# Altium PCB 2019-NUC029LAN.PcbDoc (part 1 of 2)
Units mil, origin at the board's own origin, x right, y up, seen from the top; angles counter-clockwise.
Board outline 3307.03 x 3019.03 mil, 2 copper layers (Top Layer, Bottom Layer); 66 components, 62 nets, 308 pads, 91 vias.
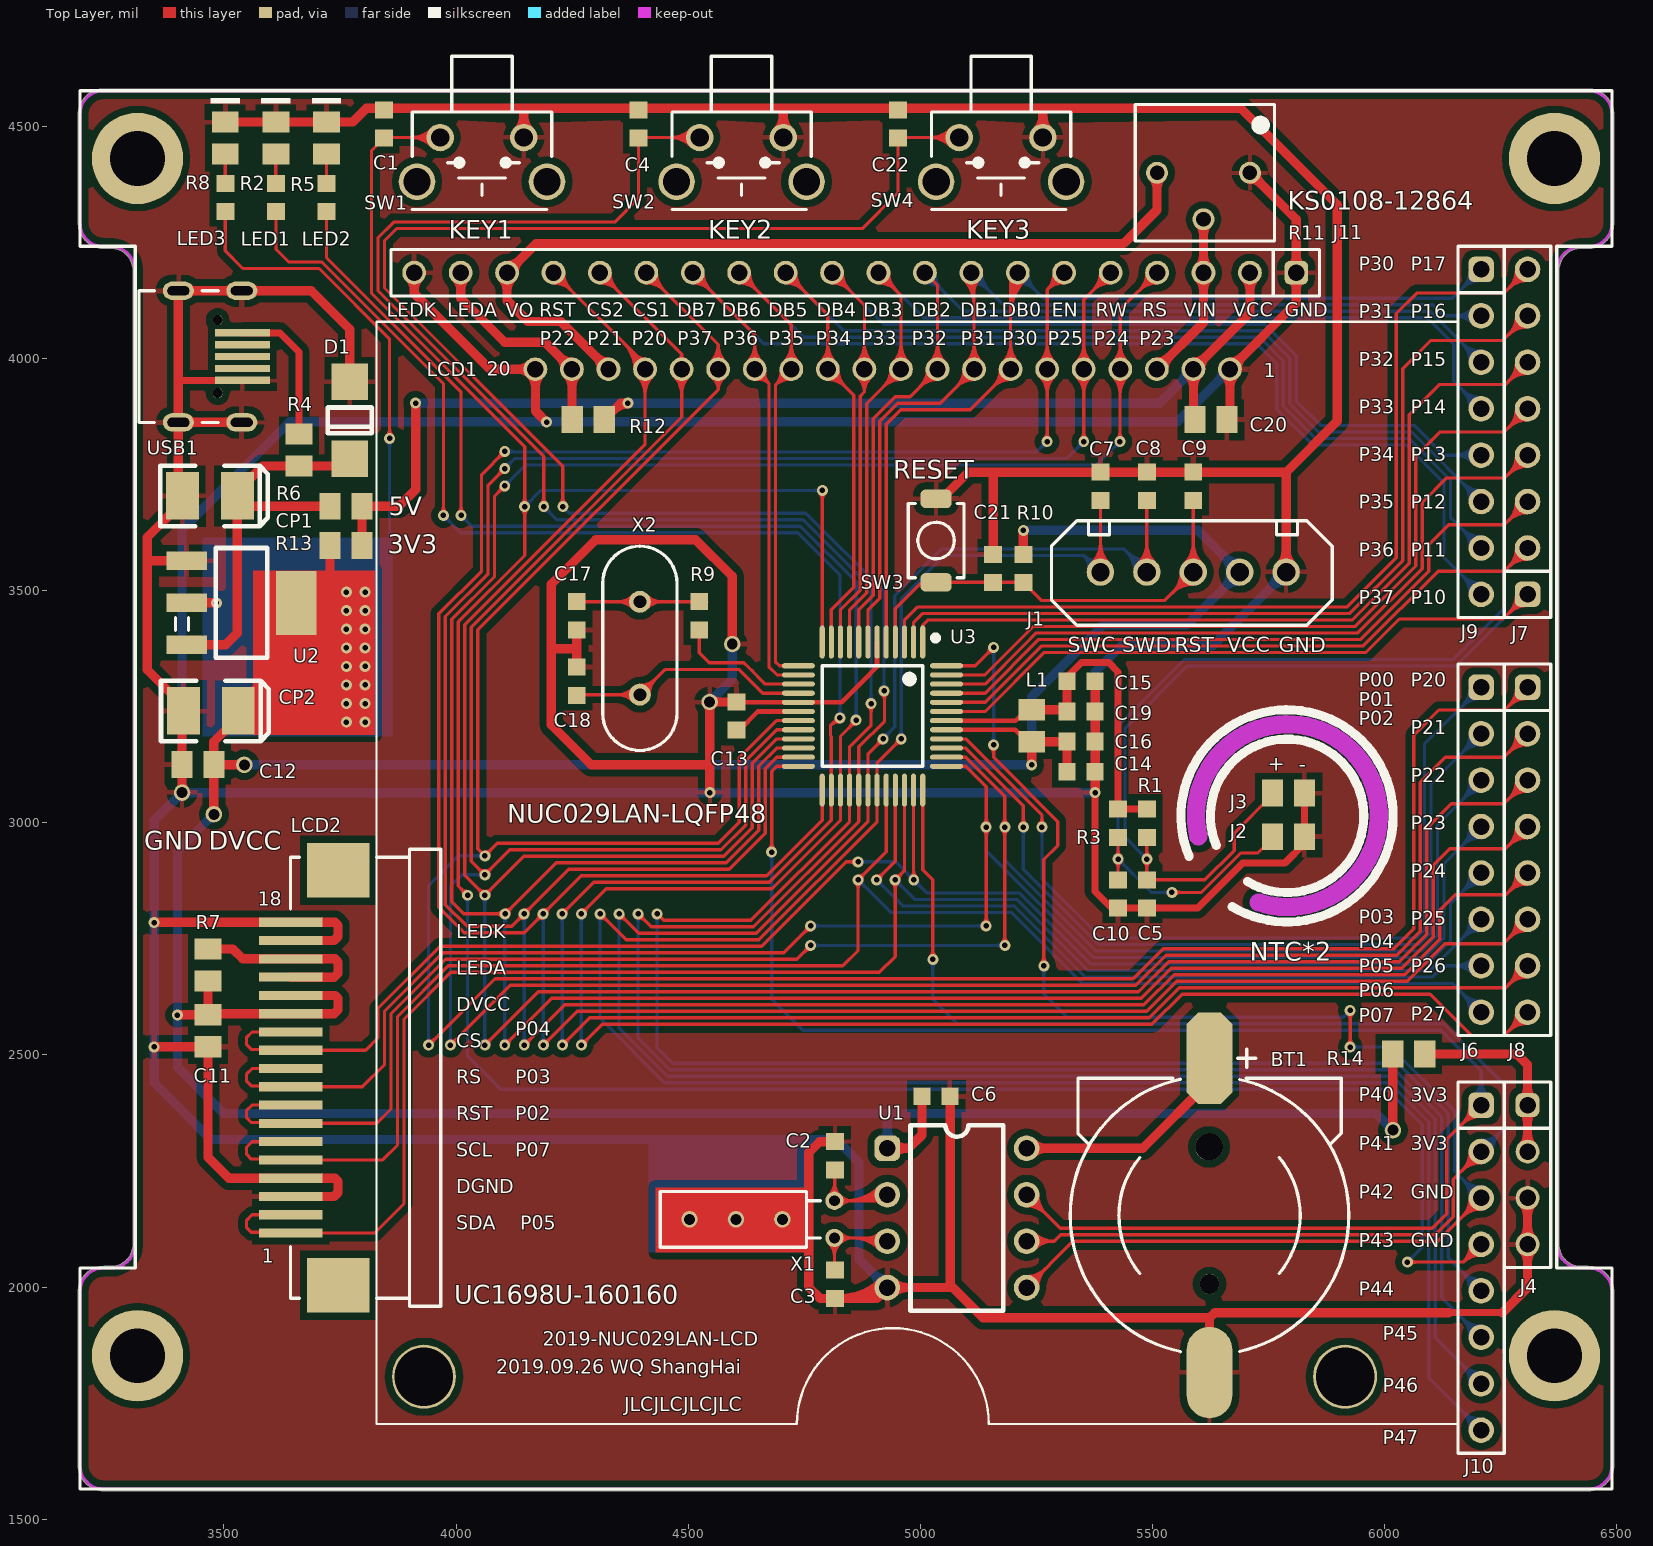
[diagram p0: Top Layer view]
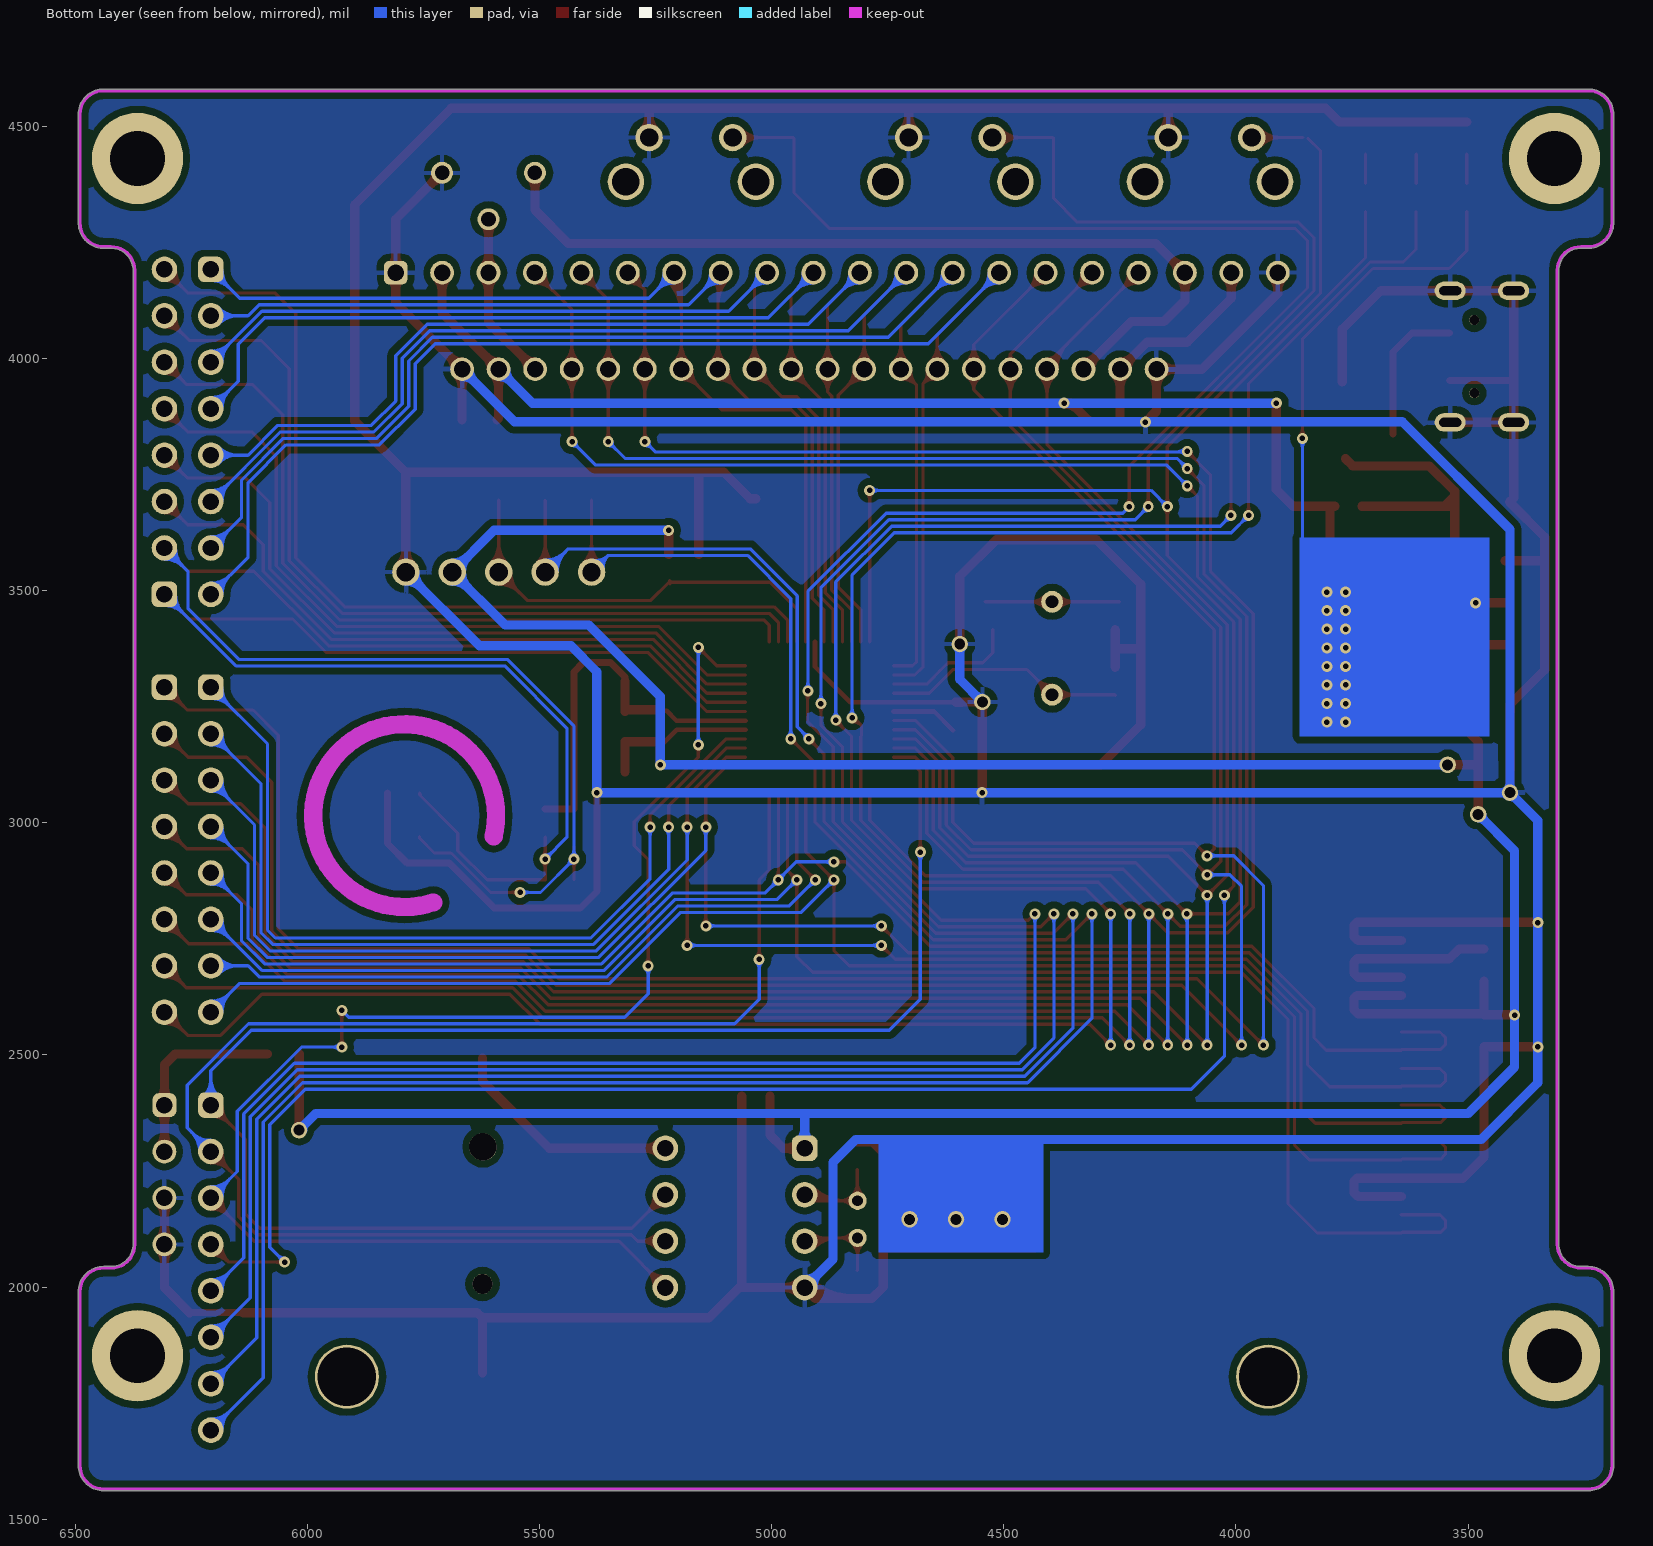
[diagram p1: Bottom Layer view, seen from below]
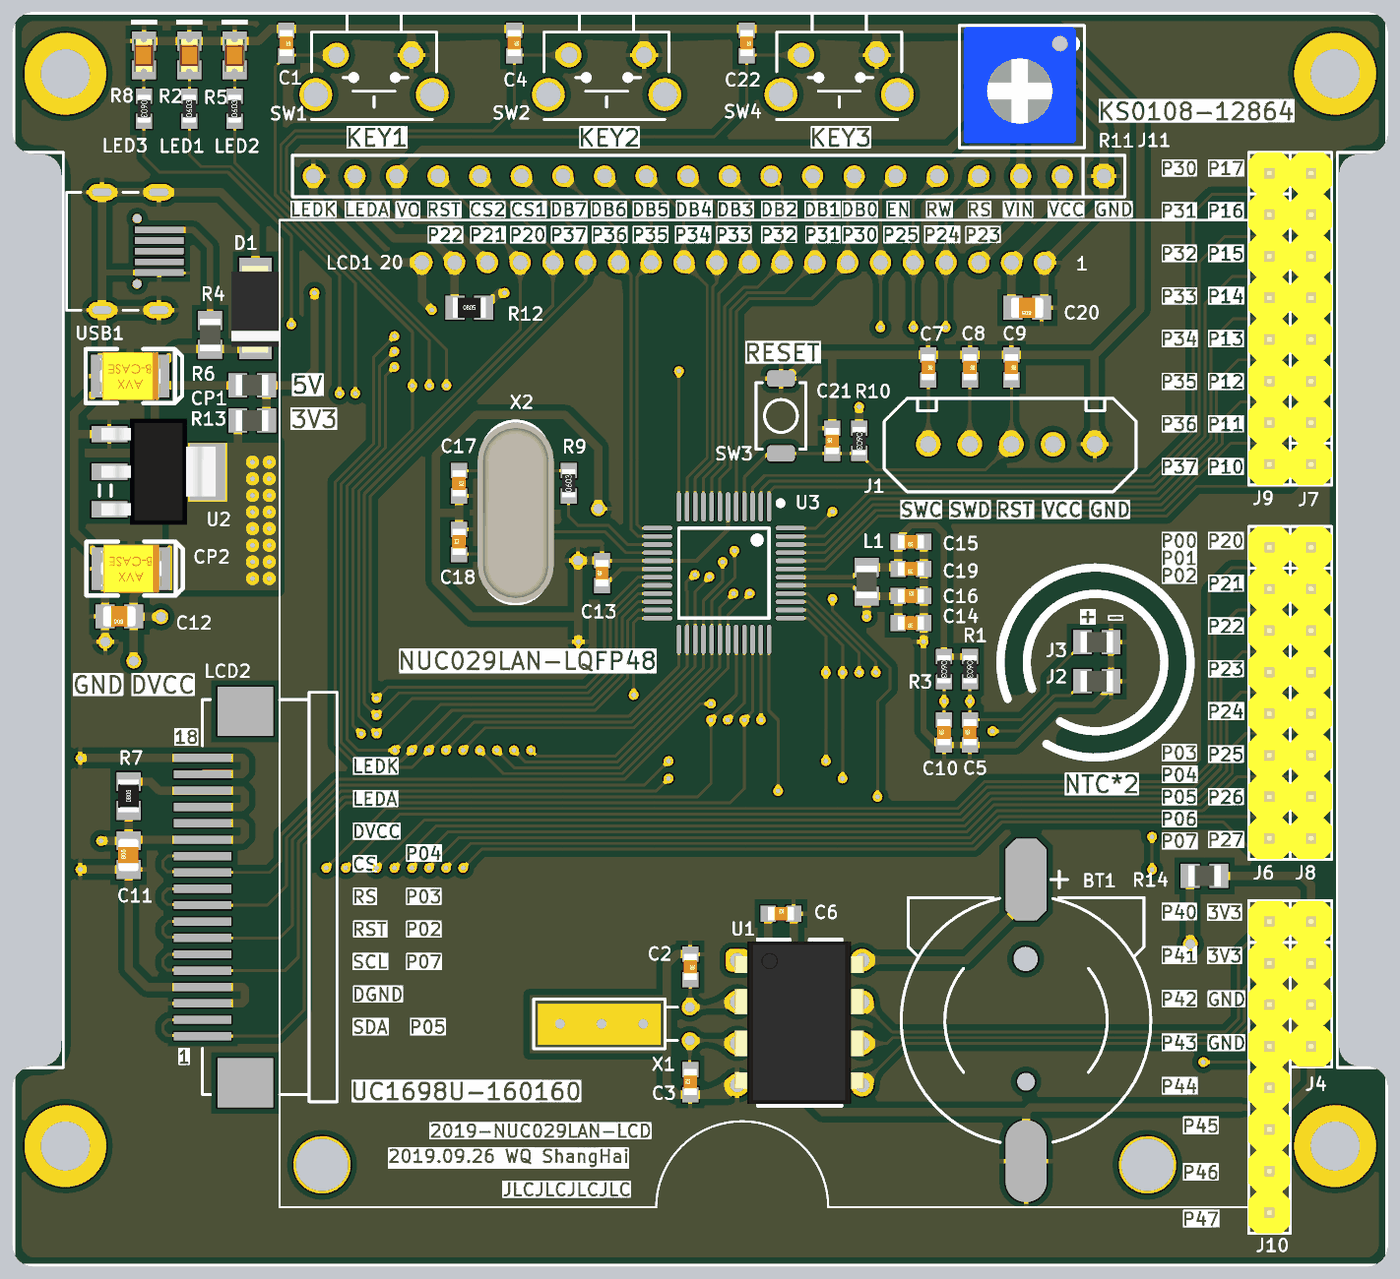
[diagram p3: 3D render of the assembled board from above, using the file's embedded part models]

## Layer stack, top to bottom
Top Layer: signal copper 1.4
Dielectric: dielectric 12.6, FR-4, Dk 4.8
Bottom Layer: signal copper 1.4

## Board outline
3186.49,1616 ccw(c3241,1616) 3241,1561.48 6439,1561.48 ccw(c6439,1616) 6493.52,1616 6493.52,1990 ccw(c6439,1990) 6439,2044.52 6423,2044.52 cw(c6423,2092) 6375.52,2092 6375.52,4190 cw(c6423,4190) 6423,4237.48 6441,4237.48 ccw(c6441,4241) 6441.68,4237.55 ccw(c6439,4292) 6493.45,4289.32 ccw(c6490,4290) 6493.52,4290 6493.52,4526 ccw(c6439,4526) 6439,4580.52 3241,4580.52 ccw(c3241,4526) 3186.49,4526 3186.49,4290 ccw(c3190,4290) 3186.55,4289.32 ccw(c3241,4292) 3238.32,4237.55 ccw(c3239,4241) 3239,4237.48 3257,4237.48 cw(c3257,4190) 3304.49,4190 3304.49,2092 cw(c3257,2092) 3257,2044.52 3241,2044.52 ccw(c3241,1990) 3186.49,1990

## Design rules (kind name [scope] priority, off if disabled: settings)
Clearance [All] p1: gap=7
ComponentClearance [All] p1 off: gap=10 collisioncheckmode=3 verticalgap=10 showdistances=FALSE
Height [All] p1 off: minheight=0 maxheight=1000 prefheight=500
HoleSize [All] p1: absolutevalues=TRUE maxlimit=196.85 minlimit=11.81 maxpercent=80.000 minpercent=20.000
MinimumSolderMaskSliver [All] p1 off: minsoldermaskwidth=10
PolygonConnect [All] p1: connectstyle=Relief reliefconductorwidth=10 reliefentries=4 polygonreliefangle="90 Angle"
RoutingVias [All] p1: holewidth=11.81 width=23.62 viastyle="Through Hole" minholewidth=11.81 minwidth=23.62 maxholewidth=11.81 maxwidth=23.62
SilkToSilkClearance [All] p1 off: silktosilkclearance=10
SilkscreenOverComponentPads [All] p1 off: minsilkscreentomaskgap=10
SolderMaskExpansion [All] p1: expansion=4
Width [All] p1: maxlimit=20 minlimit=7 preferedwidth=10
22 further rules are at their usual default settings.

## Components (designator, comment, footprint, x,y, rotation, side; value= is the part's Value field where it differs from the comment)
BT1 "Battery" cr1200 5623,2493 r270 top
C1 "0.01UF" LC-0603-C 3845,4505 r270 top
C2 "12PF" LC-0603-C 4816,2283 r270 top
C3 "12PF" LC-0603-C 4816,2006 r90 top
C4 "0.01UF" LC-0603-C 4393,4505 r270 top
C5 "0.1UF" LC-0603-C 5488,2847 r90 top
C6 "0.1UF" LC-0603-C 5034,2411 r0 top
C7 "20PF" LC-0603-C 5388,3725 r270 top
C8 "20PF" LC-0603-C 5488.5,3725 r270 top
C9 "20PF" LC-0603-C 5588,3725 r270 top
C10 "0.1UF" LC-0603-C 5426,2847 r90 top
C11 "1UF" lc-0805-c 3466,2552 r90 top
C12 "1UF" lc-0805-c 3444,3126 r180 top
C13 "1UF" LC-0603-C 4604,3230 r90 top
C14 "0.1UF" LC-0603-C 5346.31,3110 r180 top
C15 "0.1UF" LC-0603-C 5346.31,3305 r180 top
C16 "2.2UF" LC-0603-C 5346.31,3175 r0 top
C17 "12PF" LC-0603-C 4260,3446 r270 top
C18 "12PF" LC-0603-C 4260,3305 r90 top
C19 "2.2UF" LC-0603-C 5346.31,3240 r180 top
C20 "1UF" lc-0805-c 5626,3868.35 r180 top
C21 "10UF" LC-0603-C 5157,3548 r90 top
C22 "0.01UF" LC-0603-C 4952,4505 r270 top
CP1 "100UF" LC-CASE-B_3528 3470,3704 r0 top
CP2 "100UF" LC-CASE-B_3528 3472,3241 r0 top
D1 "SMAJ6.0A" LC-SMA(DO-214AC)_S3 3771,3867 r90 top
J1 "SWJ STM32" ICD2 5788,3540 r180 top locked
J2 "CON2" lc-0805-L 5793,2970 r0 top
J3 "CON2" lc-0805-L 5793,3064 r0 top
J4 "CON4" sip-4 6308,2392 r270 top locked
J6 "CON8" sip-8 6208,3292 r270 top locked
J7 "CON8" sip-8 6308,3492 r90 top locked
J8 "CON8" sip-8 6308,3292 r270 top locked
J9 "CON8" sip-8 6208,4192 r270 top locked
J10 "CON8" sip-8 6208,2392 r270 top locked
J11 "CON20" sip-20 5810,4185 r180 top locked
L1 "3.3UH" lc-0805-L 5240,3209 r270 top
LCD1 "12864 KS0108" "12864 ks0108" 6250,1705 r180 top locked
LCD2 "LCD-160160" LCD-160160 3190,1565 r0 top locked
LED1 "LED-BLUE" LC-0805-LED 3612,4475 r270 top
LED2 "LED-BLUE" LC-0805-LED 3721,4475 r270 top
LED3 "LED-BLUE" LC-0805-LED 3503,4475 r270 top
R1 "10K" LC-0603-R 5488,2999 r270 top
R2 "2K" LC-0603-R 3612.06,4347 r90 top
R3 "10K" LC-0603-R 5426,2999 r270 top
R4 "0R" lc-0805-l 3662,3803 r270 top
R5 "2K" LC-0603-R 3721,4347 r90 top
R6 "0R" lc-0805-l 3763,3682 r180 top
R7 "10R" lc-0805-r 3466,2694 r90 top
R8 "2K" LC-0603-R 3503.13,4347 r270 top
R9 "33R" LC-0603-R 4524,3446 r90 top
R10 "10K" LC-0603-R 5222,3548 r270 top
R11 "10K" dwq-4 5463,4253 r0 top
R12 "100R" lc-0805-r 4285,3868.35 r0 top
R13 "0R" lc-0805-l 3763,3597 r180 top
R14 "0R" lc-0805-l 6052,2502 r180 top
SW1 "BUTTON" button-c 4056,4386 r270 top
SW2 "BUTTON" button-c 4615,4386 r270 top
SW3 "BUTTON" button5 5034,3608 r270 top locked
SW4 "BUTTON" button-c 5174,4386 r270 top
U1 "DS1302" stc-dip8 4929,2299 r0 top
U2 "SPX1117-3V3" lc-SOT-223 3538,3474 r180 top
U3 "NUC029LAN" LC-LQFP-48_7x7x05P 4897,3230 r180 top locked
USB1 "USB-Micro-A" USB-MICRO-R 3402,4146 r270 top
X1 "32.768K" xl-2 4815,2146 r270 top
X2 "12M" xl-1 4396,3476 r270 top

## Footprints (in the part's own frame and the unit in brackets; to place one, negate y for a bottom-side part, rotate by r counter-clockwise, add the part's x,y. Pads: shape width x height; smd on the part's side, far side on the other; paste and mask are expansions set on the pad)
"12864 ks0108" [mm]
  round 3.5 hole 3.2: 0(8.509,-2.591) 0(58.903,-2.591)
  round 1.3 hole 0.9: 1(14.808,-57.709) 2(16.808,-57.709) 3(18.808,-57.709) 4(20.808,-57.709) 5(22.808,-57.709) 6(24.808,-57.709) 7(26.808,-57.709) 8(28.807,-57.709) 9(30.807,-57.709) 10(32.807,-57.709) 11(34.807,-57.709) 12(36.807,-57.709) 13(38.807,-57.709) 14(40.807,-57.709) 15(42.807,-57.709) 16(44.807,-57.709) 17(46.807,-57.709) 18(48.806,-57.709) 19(50.806,-57.709) 20(52.806,-57.709)
  silkscreen extent 2.31,-60.3 61.5,0
button5 [mm]
  rrect50% 1x1.7 smd: 1(-2.286,0) 2(2.286,0)
  silkscreen extent -2.03,-1.52 2.03,1.52
button-c [mm]
  round 2 hole 1.5: 0(0.127,3.556) 0(0.127,-3.556)
  round 1.5 hole 1: 1(-2.286,2.286) 2(-2.286,-2.286)
  silkscreen extent -6.73,-3.81 1.65,3.81
cr1200 [mm]
  round 1.5 hole 1.5 unplated: 0(4.85,-0.025)
  round 1.1 hole 1.1 unplated: 0(12.35,0)
  oct 5x2.5 smd: 1(0,0)
  oval 5x2.5 smd: 2(17.2,0)
  silkscreen extent -0.51,-7.62 16.05,7.62
dwq-4 [mm]
  round 1.2 hole 0.8: 1(6.274,3.734) 2(1.194,3.734) 3(3.734,1.194)
  silkscreen extent 0,0 7.62,7.47, body extent 0.23,0.27 7.13,7.37, height 4.9
ICD2 [mm]
  round 1.5 hole 1: 1(10.16,0) 2(7.62,0) 3(5.08,0) 4(2.54,0) 5(0,0)
  silkscreen extent -2.52,-2.81 12.84,2.91
LC-0603-C [mm]
  rect 0.93x0.98 smd: 1(-0.77,0) 2(0.77,0)
  body extent -0.8,-0.4 0.8,0.4, height 0.3
LC-0603-R [mm]
  rect 0.93x0.98 smd: 1(-0.77,0) 2(0.77,0)
  body extent -0.85,-0.4 0.85,0.4, height 0.56
lc-0805-c [mm]
  rect 1.16x1.47 smd: 1(-0.875,0) 2(0.875,0)
  body extent -1,-0.63 1,0.63, height 0.77
lc-0805-L [mm]
  rect 1.16x1.47 smd: 1(-0.875,0) 2(0.875,0)
  body extent -1,-0.64 1,0.64, height 0.6
lc-0805-l [mm]
  rect 1.16x1.47 smd: 1(-0.875,0) 2(0.875,0)
  body extent -1,-0.64 1,0.64, height 0.6
LC-0805-LED [mm]
  rect 1.16x1.47 smd: A(0.875,0) K(-0.875,0)
  silkscreen extent -2.2,-0.8 -1.9,0.8, body extent -1.01,-0.63 1.01,0.62, height 1.1
lc-0805-r [mm]
  rect 1.16x1.47 smd: 1(-0.875,0) 2(0.875,0)
  body extent -1,-0.63 1,0.63, height 0.49
LC-CASE-B_3528 [mm]
  rect 1.8x2.6 smd: 1(1.5,0) 2(-1.5,0)
  silkscreen extent -2.73,-1.65 3.16,1.65, body extent -1.85,-1.47 1.85,1.46, height 2.03
LC-LQFP-48_7x7x05P [mm]
  oval 0.28x1.8 smd mask+0.051: 1(-2.75,-4.05) 2(-2.25,-4.05) 3(-1.75,-4.05) 4(-1.25,-4.05) 5(-0.75,-4.05) 6(-0.25,-4.05) 7(0.25,-4.05) 8(0.75,-4.05) 9(1.25,-4.05) 10(1.75,-4.05) 11(2.25,-4.05) 12(2.75,-4.05) 25(2.75,4.05) 26(2.25,4.05) 27(1.75,4.05) 28(1.25,4.05) 29(0.75,4.05) 30(0.25,4.05) 31(-0.25,4.05) 32(-0.75,4.05) 33(-1.25,4.05) 34(-1.75,4.05) 35(-2.25,4.05) 36(-2.75,4.05)
  oval 1.8x0.28 smd mask+0.051: 13(4.05,-2.75) 14(4.05,-2.25) 15(4.05,-1.75) 16(4.05,-1.25) 17(4.05,-0.75) 18(4.05,-0.25) 19(4.05,0.25) 20(4.05,0.75) 21(4.05,1.25) 22(4.05,1.75) 23(4.05,2.25) 24(4.05,2.75) 37(-4.05,2.75) 38(-4.05,2.25) 39(-4.05,1.75) 40(-4.05,1.25) 41(-4.05,0.75) 42(-4.05,0.25) 43(-4.05,-0.25) 44(-4.05,-0.75) 45(-4.05,-1.25) 46(-4.05,-1.75) 47(-4.05,-2.25) 48(-4.05,-2.75)
  silkscreen extent -3.6,-4.42 2.75,2.75
LC-SMA(DO-214AC)_S3 [mm]
  rect 2x2 smd: 1(2.1,0) 2(-2.1,0)
  silkscreen extent -0.7,-1.2 0.7,1.2, body extent -2.7,-1.43 2.58,1.46, height 2.44
lc-SOT-223 [mm]
  rect 2.2x1 smd: 1(3,-2.3) 2(3,0) 3(3,2.3)
  rect 2.2x3.5 smd: 2(-3,0)
  silkscreen extent -1.4,-3 1.4,3, body extent -3.49,-3.24 3.49,3.24, height 1.64
LCD-160160 [mm]
  round 5 hole 3: 0(3.15,7.29) 0(3.15,72.796) 0(80.67,7.29) 0(80.67,72.796)
  rect 3.4x3 smd: 0(14.133,11.152) 0(14.133,33.852)
  rect 3.5x0.5 smd: 1(11.533,14.007) 2(11.533,15.007) 3(11.533,16.007) 4(11.533,17.007) 5(11.533,18.007) 6(11.533,19.007) 7(11.533,20.007) 8(11.533,21.007) 9(11.533,22.007) 10(11.533,23.007) 11(11.533,24.007) 12(11.533,25.007) 13(11.533,26.007) 14(11.533,27.007) 15(11.533,28.007) 16(11.533,29.007) 17(11.533,30.007) 18(11.533,31.007)
  silkscreen extent 0,0 83.82,76.5
sip-4 [mm]
  rrect50% 1.3x1.3 hole 0.9: 1(0,0)
  round 1.3 hole 0.9: 2(2.54,0) 3(5.08,0) 4(7.62,0)
  silkscreen extent -1.27,-1.27 8.89,1.27, body extent -1.27,-1.27 8.89,1.27, height 6
sip-8 [mm]
  rrect50% 1.4x1.4 hole 0.9: 1(0,0)
  round 1.4 hole 0.9: 2(2.54,0) 3(5.08,0) 4(7.62,0) 5(10.16,0) 6(12.7,0) 7(15.24,0) 8(17.78,0)
  silkscreen extent -1.27,-1.27 19.05,1.27, body extent -1.27,-1.27 19.05,1.27, height 6
sip-20 [mm]
  rrect50% 1.3x1.3 hole 0.9: 1(0,0)
  round 1.3 hole 0.9: 2(2.54,0) 3(5.08,0) 4(7.62,0) 5(10.16,0) 6(12.7,0) 7(15.24,0) 8(17.78,0) 9(20.32,0) 10(22.86,0) 11(25.4,0) 12(27.94,0) 13(30.48,0) 14(33.02,0) 15(35.56,0) 16(38.1,0) 17(40.64,0) 18(43.18,0) 19(45.72,0) 20(48.26,0)
  silkscreen extent -1.27,-1.27 49.53,1.27
stc-dip8 [mm]
  rrect50% 1.4x1.4 hole 0.9: 1(0,0)
  round 1.4 hole 0.9: 2(0,-2.54) 3(0,-5.08) 4(0,-7.62) 5(7.62,-7.62) 6(7.62,-5.08) 7(7.62,-2.54) 8(7.62,0)
  silkscreen extent 1.27,-8.89 6.35,1.27, body extent -0.18,-8.77 7.74,1.14, height 4.19
USB-MICRO-R [mm]
  oval 1x1.7 hole 0.5 slot 1.2 at 90 deg: 0(0,3.47) 0(0,0) 0(7.2,0) 0(7.2,3.47)
  rect 0.4x3 smd: 1(2.3,3.5) 2(2.95,3.5) 3(3.6,3.5) 4(4.25,3.5) 5(4.9,3.5)
  round 0.55 hole 0.55: G(1.6,2.15) G(5.6,2.15)
  silkscreen extent 0,-2.15 7.2,2.2
xl-1 [mm]
  round 1.2 hole 0.7: 1(0,0) 2(5.08,0)
  silkscreen extent -3.05,-2.03 8.13,2.03, body extent -2.95,-2.31 8.09,2.34, height 3.5
xl-2 [mm]
  round 1 hole 0.6: 1(-1.016,0) 2(1.016,0)
  silkscreen extent -1.52,-9.53 1.52,-0.76

## Part data
BT1: "Multicell Battery"
C1 C2 C3 C4 C5 C6 C7 C8 C9 C10 C11 C12 C13 C14 C15 C16 C17 C18 C19 C20 C21 C22: library part CAP
CP1 CP2: library part CAP1
D1: library part DIODE
J1: library part SWJ
J2 J3 J4 J6 J7 J8 J9 J10 J11: "Connector"
L1: library part INDUCTOR
LED1 LED2 LED3: library part LED
R1 R2 R3 R4 R5 R6 R7 R8 R9 R10 R12 R13 R14: library part RES
R11: library part RES-ADJ
U2: library part AMS1117
X1 X2: library part JZ

## Free pads (board coordinates)
  round 35.43 hole 23.62: 0(3410,3065) 1(3478.45,3018.45) 2(3544,3125) 3(6018,2338) 5(4546.31,3260.32) 6(4703,2146) 7(4595,3385) 7(4603,2146) 8(4503,2146)

## Via types
v1: diameter 23.62, hole 11.81, Top Layer to Bottom Layer, 91 vias

## Nets (pads, with @x,y where several pads share a name; then routed paths per layer and width w, separated by ;. In a path a pad name is that pad's centre, name@x,y a point inside that pad or via, vN(x,y) a via of type N, cw(c..) or ccw(c..) an arc to the next point about the centre after c; other vN are vias at no path point)
AIN0: C5.2 J3.1 J7.1 R1.2 U3.43 | length 3519.4
  Top Layer w7: U3.43@5056.45,3239.84 5139.84,3239.84 5267,3367 5960,3367 6032,3439 6090,3439 6255,3439 J7.1@6308,3492 ; v1@5482.12,2916.12 cw(c5467.94,2901.94) 5488,2901.94 cw(c5508.06,2901.94) v1@5493.88,2916.12 ; v1@5482.12,2927.88 ccw(c5467.94,2942.06) 5488,2942.06 ccw(c5508.06,2942.06) v1@5493.88,2927.88 ; R1.2@5488,2968.68 v1(5488,2922) C5.2@5488,2877.32 5613.06,2877.32 5676,2940.25 5676,2978 5756.83,3058.83 J3.1@5756.83,3062.28 ; J7.1@6283.94,3492 cw(c6225.86,3492) 6266.93,3450.93 cw(c6308,3409.86) J7.1@6308,3467.94 ; J7.1@6290.94,3492 cw(c6249.76,3492) 6278.88,3462.88 cw(c6308,3433.76) J7.1@6308,3474.94 ; J3.1@5756.83,3062.28 5758.55,3060.55 J3.1@5758.55,3064 J3.1@5756.83,3062.28
  Bottom Layer w7: v1@5479.69,2922 ccw(c5459.62,2922) 5473.81,2936.19 ccw(c5488,2950.38) v1@5488,2930.31 ; v1(5488,2922) 5441,2969 5441,3204 5575,3338 6154,3338 J7.1@6308,3492 ; J7.1@6283.94,3492 cw(c6225.86,3492) 6266.93,3450.93 cw(c6308,3409.86) J7.1@6308,3467.94 ; J7.1@6290.94,3492 cw(c6249.76,3492) 6278.88,3462.88 cw(c6308,3433.76) J7.1@6308,3474.94
AIN1: C10.2 J2.1 J7.2 R3.2 U3.44 | length 3751.2
  Top Layer w7: U3.44@5056.45,3259.53 5139.73,3259.53 5261.2,3381 5954.2,3381 6115.2,3542 6258,3542 J7.2@6308,3592 ; v1@5420.12,2916.12 cw(c5405.94,2901.94) 5426,2901.94 cw(c5446.06,2901.94) v1@5431.88,2916.12 ; v1@5420.12,2927.88 ccw(c5405.94,2942.06) 5426,2942.06 ccw(c5446.06,2942.06) v1@5431.88,2927.88 ; C10.2@5426,2877.32 v1(5426,2922) 5426,2949.68 ; v1(5542,2850) 5605.54,2850 5690.54,2935 5727,2935 5758.55,2966.55 J2.1@5758.55,2970 ; v1@5547.88,2844.12 cw(c5562.06,2829.94) 5562.06,2850 cw(c5562.06,2870.06) v1@5547.88,2855.88 ; J7.2@6283.94,3592 cw(c6225.86,3592) 6266.93,3550.93 cw(c6308,3509.86) J7.2@6308,3567.94 ; J7.2@6290.94,3592 cw(c6249.76,3592) 6278.88,3562.88 cw(c6308,3533.76) J7.2@6308,3574.94
  Bottom Layer w7: v1@5420.12,2927.88 ccw(c5405.94,2942.06) 5426,2942.06 ccw(c5446.06,2942.06) v1@5431.88,2927.88 ; v1@5426,2913.69 cw(c5426,2893.62) 5440.19,2907.81 cw(c5454.38,2922) v1@5434.31,2922 ; v1@5536.12,2844.12 ccw(c5521.94,2829.94) 5521.94,2850 ccw(c5521.94,2870.06) v1@5536.12,2855.88 ; v1(5542,2850) 5498,2850 v1(5426,2922) 5426,3208.8 5569.2,3352 6148.2,3352 6257,3460.8 6257,3541 J7.2@6308,3592 ; J7.2@6283.94,3592 cw(c6225.86,3592) 6266.93,3550.93 cw(c6308,3509.86) J7.2@6308,3567.94 ; J7.2@6290.94,3592 cw(c6249.76,3592) 6278.88,3562.88 cw(c6308,3533.76) J7.2@6308,3574.94
AIN2: J7.3 U3.45 | length 1612.1
  Top Layer w7: U3.45@5056.45,3279.21 5139.61,3279.21 5255.4,3395 5948.4,3395 6095,3541.6 6095,3599 6138,3642 6258,3642 J7.3@6308,3692 ; J7.3@6283.94,3692 cw(c6225.86,3692) 6266.93,3650.93 cw(c6308,3609.86) J7.3@6308,3667.94 ; J7.3@6290.94,3692 cw(c6249.76,3692) 6278.88,3662.88 cw(c6308,3633.76) J7.3@6308,3674.94
AIN3: J7.4 U3.46 | length 1695.3
  Top Layer w7: U3.46@5056.45,3298.9 5139.5,3298.9 5225.8,3385.2 5249.6,3409 5942.6,3409 6081,3547.4 6081,3690 6134,3743 6259,3743 J7.4@6308,3792 ; J7.4@6283.94,3792 cw(c6225.86,3792) 6266.93,3750.93 cw(c6308,3709.86) J7.4@6308,3767.94 ; J7.4@6290.94,3792 cw(c6249.76,3792) 6278.88,3762.88 cw(c6308,3733.76) J7.4@6308,3774.94
AIN4: J7.5 U3.47 | length 1783.1
  Top Layer w7: U3.47@5056.45,3318.58 5139.39,3318.58 5243.8,3423 5936.8,3423 6067,3553.2 6067,3789 6120,3842 6258,3842 J7.5@6308,3892 ; J7.5@6283.94,3892 cw(c6225.86,3892) 6266.93,3850.93 cw(c6308,3809.86) J7.5@6308,3867.94 ; J7.5@6290.94,3892 cw(c6249.76,3892) 6278.88,3862.88 cw(c6308,3833.76) J7.5@6308,3874.94
AIN5: J7.6 U3.1 | length 1916.7
  Top Layer w7: U3.1@5005.27,3389.45 5005.27,3425.27 5017,3437 5931.01,3437 6053,3558.99 6053,3879 6118,3944 6260,3944 J7.6@6308,3992 ; J7.6@6283.94,3992 cw(c6225.86,3992) 6266.93,3950.93 cw(c6308,3909.86) J7.6@6308,3967.94 ; J7.6@6290.94,3992 cw(c6249.76,3992) 6278.88,3962.88 cw(c6308,3933.76) J7.6@6308,3974.94
AIN6: J7.7 U3.2 | length 2082.9
  Top Layer w7: U3.2@4985.58,3389.45 4985.58,3431.58 5005,3451 5434,3451 ; 5480.8,3451 5434,3451 ; J7.7@6283.94,4092 cw(c6225.86,4092) 6266.93,4050.93 cw(c6308,4009.86) J7.7@6308,4067.94 ; J7.7@6290.94,4092 cw(c6249.76,4092) 6278.88,4062.88 cw(c6308,4033.76) J7.7@6308,4074.94 ; J7.7@6308,4092 6255,4039 6100,4039 6039,3978 6039,3564.79 5925.21,3451 5434,3451
AIN7: J7.8 U3.3 | length 2166
  Top Layer w7: U3.3@4965.9,3389.45 4965.9,3435.9 4995,3465 5919.41,3465 6025,3570.59 6025,4097 6069,4141 6257,4141 J7.8@6308,4192 ; J7.8@6283.94,4192 cw(c6225.86,4192) 6266.93,4150.93 cw(c6308,4109.86) J7.8@6308,4167.94 ; J7.8@6290.94,4192 cw(c6249.76,4192) 6278.88,4162.88 cw(c6308,4133.76) J7.8@6308,4174.94
AVCC: C15.2 C19.2 L1.1 R1.1 R3.1 U3.42 | length 832.6
  Top Layer w10: U3.42@5056.45,3220.16 5205.16,3220.16 5226.45,3241.45 L1.1@5240,3241.45 ; C19.2@5312.55,3243.45 C19.2@5316,3240
  Top Layer w15: C15.2@5316,3305 5316,3314 5347,3345 5406,3345 5426,3325 R3.1@5426,3029.32 R1.1@5488,3029.32
  Top Layer w20: L1.1@5240,3243.45 C19.2@5312.55,3243.45 ; C19.2@5316,3240 C15.2@5316,3305
DGND: BT1.2 C1.1 C2.1 C3.1 C4.1 C5.1 C6.2 C7.1 C8.1 C9.1 C10.1 C11.1 C12.2 C13.2 C14.1 C15.1 C16.2 C17.2 C18.2 C19.1 C20.1 C21.2 C22.1 CP1.2 CP2.2 D1.1 J1.5 J2.2 J3.2 J4.3 J4.4 J11.1 J11.20 LCD1.1 LCD1.20 LCD2.3 LCD2.4 LCD2.17 LCD2.18 LED1.K LED2.K LED3.K pad.0 pad.5 pad.6 pad.7 pad.8 R11.1 SW1.1 SW2.1 SW3.1 SW4.1 U1.4 U2.1 U3.6 U3.17 USB1.0 USB1.5 | length 25374.2
  Top Layer w10: C13.2@4602.2,3259.53 U3.17@4737.55,3259.53 4830.53,3259.53 4844.5,3273.5 4876,3305 4906.84,3335.84 U3.6@4906.84,3389.45
  Top Layer w15: 3411.86,3953.09 USB1.5@3539.8,3953.09 ; v1(5376.63,3065) 5376.63,2852.37 5412.31,2816.68 C10.1@5426,2816.68 C5.1@5488,2816.68 5597.69,2816.68 5694,2913 5785,2913 5827.45,2955.45 J2.2@5827.45,2970 J3.2@5827.45,3064 ; 6138,1945 6254,1945
  Top Layer w20: v1@3350.74,2785.74 LCD2.18@3644.04,2785.74 3739.26,2785.74 3746,2779 ; v1@3352.45,2517.55 C11.1@3466,2517.55 3466,2279.57 3511,2234.57 LCD2.4@3644.04,2234.57 3739.26,2234.57 3746,2227.82 ; USB1.0@3395.15,3855.69 cw(c3378.62,3839.15) 3402,3839.15 cw(c3425.38,3839.15) USB1.0@3408.85,3855.69 ; USB1.0@3395.15,3869.38 ccw(c3378.62,3885.92) 3402,3885.92 ccw(c3425.38,3885.92) USB1.0@3408.85,3869.38 ; USB1.0@3395.15,4139.15 cw(c3378.62,4122.62) 3402,4122.62 cw(c3425.38,4122.62) USB1.0@3408.85,4139.15 ; pad.0@3404.54,3070.46 ccw(c3391.37,3083.63) 3410,3083.63 ccw(c3428.63,3083.63) pad.0@3415.46,3070.46 ; C12.2@3409.55,3115 3409.55,3155 ; CP2.2@3409.55,3241 CP2.2@3409.55,3240 ; pad.0@3410,3065 3410,3239.55 CP2.2@3409.55,3240 ; USB1.0@3410.95,4137.06 USB1.0@3402,4146 USB1.0@3402,3862.54 3402,3699.89 3410.95,3690.95 3335,3615 3335,3560 ; USB1.0@3412,3862.54 USB1.0@3548.61,3862.54 ; USB1.0@3412,4146 USB1.0@3538.61,4146 3688,4146 3771,4063 D1.1@3771,3949.68 ; U2.1@3419.89,3564.55 3339.55,3564.55 3335,3560 ; USB1.0@3422.63,3855.69 cw(c3439.16,3839.15) 3439.16,3862.54 cw(c3439.16,3885.92) USB1.0@3422.63,3869.38 ; USB1.0@3422.63,4139.15 cw(c3439.16,4122.62) 3439.16,4146 cw(c3439.16,4169.38) USB1.0@3422.63,4152.85 ; LED3.K@3503,4509.45 LED1.K@3612,4509.45 LED2.K@3721,4509.45 3777.45,4509.45 3807,4539 4146,4539 ; USB1.0@3517.99,3855.69 ccw(c3501.45,3839.15) 3501.45,3862.54 ccw(c3501.45,3885.92) USB1.0@3517.99,3869.38 ; USB1.0@3517.99,4139.15 ccw(c3501.45,4122.62) 3501.45,4146 ccw(c3501.45,4169.38) USB1.0@3517.99,4152.85 ; USB1.0@3559.24,4139.15 cw(c3575.78,4122.62) 3575.78,4146 cw(c3575.78,4169.38) USB1.0@3559.24,4152.85 ; LCD2.3@3644.04,2195.2 3737.38,2195.2 3746,2203.82 3746,2227.82 ; LCD2.17@3644.04,2746.38 3737.38,2746.38 3746,2755 3746,2779 ; 3740,2233.82 3746,2227.82 ; 3740,2785 3746,2779 ; J11.20@3898.98,4173.98 cw(c3872.36,4147.36) 3910,4147.36 cw(c3947.64,4147.36) J11.20@3921.02,4173.98 ; J11.20@3910,4185 3910,4140 4073,3977 LCD1.20@4171.01,3977 4171.01,3886.99 v1(4195,3863) ; SW1.1@4132.19,4489.81 ccw(c4098.86,4523.14) 4146,4523.14 ccw(c4193.14,4523.14) SW1.1@4159.81,4489.81 ; 4146,4506 4146,4539 ; LCD1.20@4159.99,3988.02 cw(c4133.37,4014.64) 4133.37,3977 cw(c4133.37,3939.36) 4159.99,3965.98 cw(c4133.37,3939.36) 4171.01,3939.36 cw(c4208.65,3939.36) LCD1.20@4182.04,3965.98 ; C18.2@4260,3335.32 4260,3375 ; C17.2@4260,3415.68 4260,3375 ; 4520,3125 4306,3125 ; pad.5@4540.86,3254.86 cw(c4527.69,3241.69) 4546.31,3241.69 cw(c4564.94,3241.69) 4551.77,3254.86 cw(c4564.94,3241.69) 4564.94,3260.32 cw(c4564.94,3278.94) pad.5@4551.77,3265.77 ; v1(4547,3065) 4547,3064 4546.31,3064.68 4546.31,3126 ; pad.7@4589.54,3390.46 ccw(c4576.37,3403.63) 4595,3403.63 ccw(c4613.63,3403.63) pad.7@4600.46,3390.46 ; C13.2@4590.53,3259.53 4602.2,3259.53 C13.2@4602.99,3260.32 ; pad.7@4595,3385 4595,3531 4516,3610 4301,3610 4205,3514 4205,3375 ; C13.2@4604,3260.32 C13.2@4602.99,3260.32 ; SW2.1@4691.19,4489.81 ccw(c4657.86,4523.14) 4705,4523.14 ccw(c4752.14,4523.14) SW2.1@4718.81,4489.81 ; SW2.1@4705,4476 4705,4535 4709,4539 ; C2.1@4814.31,2315 C2.1@4816,2313.32 4783.31,2313.32 4760,2290 4760,2000 4784.31,1975.68 C3.1@4816,1975.68 4905.69,1975.68 U1.4@4929,1999 ; C3.1@4830.32,1975.69 ccw(c4830.32,2097.68) U1.4@4916.58,2011.42 ; 4878.61,1975.68 ccw(c4878.61,2049.39) U1.4@4930.73,1997.27 ; U1.4@4941.42,1986.58 cw(c4971.39,1956.61) 4971.39,1999 cw(c4971.39,2041.39) U1.4@4941.42,2011.42 ; 4960,1999 U1.4@4929,1999 ; SW3.1@5034,3698 5046,3698 5103.31,3755.32 C7.1@5388,3755.32 C8.1@5488.5,3755.32 C9.1@5588,3755.32 5788,3755.32 ; C6.2@5064.31,2411 5064.31,2004.68 5135,1934 5623,1934 ; 5066,1999 U1.4@4929,1999 ; C21.2@5157,3578.32 5157,3754.32 ; SW4.1@5250.19,4489.81 ccw(c5216.86,4523.14) 5264,4523.14 ccw(c5311.14,4523.14) SW4.1@5277.81,4489.81 ; SW4.1@5263,4477 SW4.1@5264,4476 5264,4538 5263,4539 ; v1(5376.63,3065) C14.1@5376.63,3110 C16.2@5376.63,3175 C19.1@5376.63,3240 C15.1@5376.63,3305 ; BT1.2@5623,1815.83 5623,1934 ; LCD1.1@5655.98,3965.98 cw(c5629.36,3939.36) 5667,3939.36 cw(c5704.64,3939.36) LCD1.1@5678.02,3965.98 ; C20.1@5667,3868.35 LCD1.1@5667,3977 5810,4120 J11.1@5810,4185 5810,4300.02 R11.1@5710.01,4400.01 ; LCD1.1@5667,3992.59 ccw(c5667,4030.23) 5693.61,4003.61 ccw(c5720.23,3977) LCD1.1@5682.59,3977 ; R11.1@5697.01,4400.01 R11.1@5703.51,4393.51 ; R11.1@5710.01,4386.39 cw(c5710.01,4353.5) 5733.26,4376.75 cw(c5756.52,4400.01) R11.1@5723.63,4400.01 ; J1.5@5774.19,3553.81 ccw(c5740.86,3587.14) 5788,3587.14 ccw(c5835.14,3587.14) J1.5@5801.81,3553.81 ; J1.5@5788,3540 5788,3755.32 ; J11.1@5798.98,4173.98 cw(c5772.36,4147.36) 5810,4147.36 cw(c5847.64,4147.36) J11.1@5821.02,4173.98 ; J11.1@5798.98,4196.02 ccw(c5772.36,4222.64) 5810,4222.64 ccw(c5847.64,4222.64) J11.1@5821.02,4196.02 ; 6138,1945 5634,1945 5623,1934 ; 6254,1945 6308,1999 J4.4@6308,2092 J4.3@6308,2192 ; J4.4@6296.98,2080.98 cw(c6270.36,2054.36) 6308,2054.36 cw(c6345.64,2054.36) J4.4@6319.02,2080.98 ; J4.4@6296.98,2103.02 ccw(c6270.36,2129.64) 6308,2129.64 ccw(c6345.64,2129.64) J4.4@6319.02,2103.02 ; J4.3@6296.98,2180.98 cw(c6270.36,2154.36) 6308,2154.36 cw(c6345.64,2154.36) J4.3@6319.02,2180.98 ; 3335,3560 3335,3330 3409.55,3255.45 CP2.2@3409.55,3240 ; 4146,4539 4709,4539 ; 4205,3375 4205,3211 4291,3125 4306,3125 ; 4205,3375 4260,3375 ; 4306,3125 4545.31,3125 4546.31,3126 ; 4546.31,3126 pad.5@4546.31,3260.32 C13.2@4602.99,3260.32 ; 4709,4539 5263,4539 ; 5263,4539 5690,4539 5898,4331 5898,3865.32 5788,3755.32
  Bottom Layer w20: pad.0@3402.28,3065 cw(c3383.65,3065) 3396.83,3051.83 cw(c3410,3038.65) pad.0@3410,3057.28 ; pad.0@3404.54,3070.46 ccw(c3391.37,3083.63) 3410,3083.63 ccw(c3428.63,3083.63) 3415.46,3070.46 ccw(c3428.63,3083.63) 3428.63,3065 ccw(c3428.63,3046.37) pad.0@3415.46,3059.54 ; v1(4195,3863) v1@4195,3864 ; pad.5@4546.31,3260.32 4595,3309 pad.7@4595,3385 ; pad.5@4546.31,3268.03 ccw(c4546.31,3286.66) 4559.49,3273.49 ccw(c4572.66,3260.32) pad.5@4554.03,3260.32 ; pad.7@4589.54,3379.54 cw(c4576.37,3366.37) 4595,3366.37 cw(c4613.63,3366.37) pad.7@4600.46,3379.54 ; U1.4@4911.44,1999 ccw(c4869.05,1999) 4899.02,2028.98 ccw(c4929,2058.95) U1.4@4929,2016.56 ; U1.4@4929,1999 4868,2060 4868,2269 4819,2318 3472,2318 3350,2440 v1(3350,2517.55) v1(3350,2785) 3350,3005 pad.0@3410,3065 ; LCD1.1@5651.41,3977 cw(c5613.77,3977) 5640.39,3950.39 cw(c5667,3923.77) LCD1.1@5667,3961.41 ; LCD1.1@5667,3977 5554,3864 v1@4195,3864 ; J1.5@5768.47,3540 cw(c5721.33,3540) 5754.66,3506.66 cw(c5788,3473.33) J1.5@5788,3520.47 ; J1.5@5788,3540 5629.5,3381.5 5432.5,3381.5 5376.63,3325.63 v1(5376.63,3065) v1(4547,3065) pad.0@3410,3065 ; pad.0@3410,3065 3410,3632 3642,3864 v1@4195,3864
DS-CE: J10.3 U1.5 U3.48 | length 4012
  Top Layer w7: U3.48@5056.45,3338.27 5118.27,3338.27 v1(5158,3378) ; v1@5149.69,3378 cw(c5129.62,3378) 5143.81,3363.81 cw(c5158,3349.62) v1@5158,3369.69 ; v1@5152.12,3162.12 cw(c5137.94,3147.94) 5158,3147.94 cw(c5178.06,3147.94) v1@5163.88,3162.12 ; v1(5158,3168) 5158,3140.8 5296,3002.8 5296,2951 5266,2921 v1(5266,2692) ; U1.5@5229,1999 5328.67,2098.67 6114.67,2098.67 6159,2143 J10.3@6208,2192 ; U1.5@5229,2016.06 ccw(c5229,2057.24) 5258.12,2028.12 ccw(c5287.24,1999) U1.5@5246.06,1999 ; U1.5@5229,2023.06 ccw(c5229,2081.14) 5270.07,2040.07 ccw(c5311.14,1999) U1.5@5253.06,1999 ; v1@5260.12,2697.88 ccw(c5245.94,2712.06) 5266,2712.06 ccw(c5286.06,2712.06) v1@5271.88,2697.88 ; v1@5920.12,2522.88 ccw(c5905.94,2537.06) 5926,2537.06 ccw(c5946.06,2537.06) v1@5931.88,2522.88 ; v1@5920.12,2590.12 cw(c5905.94,2575.94) 5926,2575.94 cw(c5946.06,2575.94) v1@5931.88,2590.12 ; v1(5926,2517) v1(5926,2596) ; J10.3@6183.94,2192 cw(c6125.86,2192) 6166.93,2150.93 cw(c6208,2109.86) J10.3@6208,2167.94 ; J10.3@6190.94,2192 cw(c6149.76,2192) 6178.88,2162.88 cw(c6208,2133.76) J10.3@6208,2174.94
  Bottom Layer w7: v1@5152.12,3173.88 ccw(c5137.94,3188.06) 5158,3188.06 ccw(c5178.06,3188.06) v1@5163.88,3173.88 ; v1@5152.12,3372.12 cw(c5137.94,3357.94) 5158,3357.94 cw(c5178.06,3357.94) v1@5163.88,3372.12 ; v1(5158,3168) v1(5158,3378) ; v1@5260.12,2686.12 cw(c5245.94,2671.94) 5266,2671.94 cw(c5286.06,2671.94) v1@5271.88,2686.12 ; v1(5266,2692) 5266,2632 5317,2581 5911,2581 v1(5926,2596) ; v1(5926,2517) 6012.8,2517 6151,2378.8 6151,2249 J10.3@6208,2192 J10.3@6208,2201 ; v1@5931.88,2511.12 cw(c5946.06,2496.94) 5946.06,2517 cw(c5946.06,2537.06) v1@5931.88,2522.88 ; J10.3@6183.94,2192 ccw(c6125.86,2192) 6166.93,2233.07 ccw(c6208,2274.14) J10.3@6208,2216.06 ; J10.3@6190.94,2192 ccw(c6149.76,2192) 6178.88,2221.12 ccw(c6208,2250.24) J10.3@6208,2209.06
DS-DAT: J10.2 U1.6 U3.36 | length 3574.1
  Top Layer w7: U3.36@5005.27,3070.55 5005.27,2898.73 5027,2877 v1(5027,2706) ; v1@5021.12,2711.88 ccw(c5006.94,2726.06) 5027,2726.06 ccw(c5047.06,2726.06) v1@5032.88,2711.88 ; U1.6@5229,2099 5289,2099 5302.67,2112.67 6108.87,2112.67 6148,2151.8 6148,2232 J10.2@6208,2292 ; U1.6@5241.06,2086.94 cw(c5270.18,2057.82) 5270.18,2099 cw(c5270.18,2140.18) U1.6@5241.06,2111.06 ; U1.6@5246.01,2081.99 cw(c5287.08,2040.92) 5287.08,2099 cw(c5287.08,2157.08) U1.6@5246.01,2116.01 ; J10.2@6183.94,2292 cw(c6125.86,2292) 6166.93,2250.93 cw(c6208,2209.86) J10.2@6208,2267.94 ; J10.2@6190.94,2292 cw(c6149.76,2292) 6178.88,2262.88 cw(c6208,2233.76) J10.2@6208,2274.94
  Bottom Layer w7: v1@5021.12,2700.12 cw(c5006.94,2685.94) 5027,2685.94 cw(c5047.06,2685.94) v1@5032.88,2700.12 ; v1@5027,2711 v1(5027,2706) 5027,2620 5080,2567 6002.4,2567 6127,2567 6259,2435 6259,2343 J10.2@6208,2292 ; J10.2@6208,2309.06 ccw(c6208,2350.24) 6237.12,2321.12 ccw(c6266.24,2292) J10.2@6225.06,2292 ; J10.2@6208,2316.06 ccw(c6208,2374.14) 6249.07,2333.07 ccw(c6290.14,2292) J10.2@6232.06,2292
DS-SCK: J10.1 U1.7 U3.24 | length 3962.4
  Top Layer w7: v1@4674.12,2942.88 ccw(c4659.94,2957.06) 4680,2957.06 ccw(c4700.06,2957.06) v1@4685.88,2942.88 ; v1(4680,2937) 4680,3110.8 4690.93,3121.73 U3.24@4737.55,3121.73 ; U1.7@5229,2174.94 cw(c5229,2116.86) 5270.07,2157.93 cw(c5311.14,2199) U1.7@5253.06,2199 ; U1.7@5229,2181.94 cw(c5229,2140.76) 5258.12,2169.88 cw(c5287.24,2199) U1.7@5246.06,2199 ; U1.7@5229,2199 5301.33,2126.67 6103.07,2126.67 6134,2157.6 6134,2318 J10.1@6208,2392 ; J10.1@6183.94,2392 cw(c6125.86,2392) 6166.93,2350.93 cw(c6208,2309.86) J10.1@6208,2367.94 ; J10.1@6190.94,2392 cw(c6149.76,2392) 6178.88,2362.88 cw(c6208,2333.76) J10.1@6208,2374.94
  Bottom Layer w7: v1@4674.12,2931.12 cw(c4659.94,2916.94) 4680,2916.94 cw(c4700.06,2916.94) v1@4685.88,2931.12 ; v1(4680,2937) 4680,2620 4747,2553 6121.2,2553 6208,2466.2 J10.1@6208,2392 ; J10.1@6190.99,2409.01 ccw(c6149.92,2450.08) 6208,2450.08 ccw(c6266.08,2450.08) J10.1@6225.01,2409.01 ; J10.1@6195.94,2404.06 ccw(c6166.82,2433.18) 6208,2433.18 ccw(c6249.18,2433.18) J10.1@6220.06,2404.06
DVCC: C6.1 C11.2 C12.1 C14.2 C16.1 CP2.1 J1.4 L1.2 LCD2.13 LCD2.14 pad.1 pad.2 pad.3 R7.1 R8.2 R10.1 R13.2 R14.2 U1.1 U2.2 U3.41 | length 10310.2
  Top Layer w7: R8.2@3503.13,4316.69 3503,4316.56 3503,4232 3541,4194 3705.01,4194 3857,4042.01 v1(3857,3828) ; v1@3851.12,3833.88 ccw(c3836.94,3848.06) 3857,3848.06 ccw(c3877.06,3848.06) v1@3862.88,3833.88
  Top Layer w10: U3.41@5056.45,3200.47 5204.53,3200.47 5232.45,3172.55 L1.2@5240,3172.55 ; C16.1@5315.55,3174.55 C16.1@5316,3175
  Top Layer w20: v1@3400,2585 3398.55,2586.45 C11.2@3466,2586.45 ; U2.2@3419.89,3474 v1(3484,3474) ; R7.1@3466,2659.55 C11.2@3466,2586.45 ; pad.1@3472.99,3023.91 ccw(c3459.82,3037.08) 3478.45,3037.08 ccw(c3497.08,3037.08) pad.1@3483.91,3023.91 ; pad.1@3478.45,3018.45 C12.1@3478.45,3123 ; C12.1@3480.45,3130.45 C12.1@3480.45,3125 ; C12.1@3481.45,3120 C12.1@3478.45,3123 ; CP2.1@3531.06,3241 3629,3241 3728.55,3340.55 R13.2@3728.55,3587 ; pad.2@3538.54,3119.54 ccw(c3525.37,3106.37) 3525.37,3125 ccw(c3525.37,3143.63) pad.2@3538.54,3130.46 ; pad.2@3544,3125 C12.1@3480.45,3125 ; LCD2.14@3644.04,2628.26 3739.26,2628.26 3746,2621.52 ; U2.2@3656.11,3495.11 U2.2@3656.11,3474 3656.11,3376.11 3531.06,3251.06 3531.06,3227.06 3478.45,3174.45 C12.1@3478.45,3123 ; R13.2@3718.55,3597 R13.2@3728.55,3587 ; R13.2@3728.55,3597 R13.2@3728.55,3587 ; R13.2@3730,3585.55 R13.2@3728.55,3587 ; 3740,2627.52 3746,2621.52 ; U1.1@4929,2299 4975,2299 5003.69,2327.68 C6.1@5003.69,2411 ; U1.1@4941.42,2286.58 cw(c4971.39,2256.61) 4971.39,2299 cw(c4971.39,2341.39) U1.1@4941.42,2311.42 ; R10.1@5222,3578.32 v1(5222,3630) ; v1(5240,3125) 5240,3172.55 L1.2@5240,3174.55 C16.1@5315.55,3174.55 ; C14.2@5316,3110 C16.1@5316,3175 ; pad.3@6017.55,2338.45 R14.2@6017.55,2502 ; 6017.55,2357.71 ccw(c6037.71,2357.71) pad.3@6023.46,2343.46 ; C11.2@3466,2586.45 3468.45,2588.89 LCD2.13@3644.04,2588.89 3737.38,2588.89 3746,2597.52 3746,2621.52 ; C12.1@3478.45,3123 C12.1@3480.45,3125
  Bottom Layer w7: v1@3851.12,3822.12 cw(c3836.94,3807.94) 3857,3807.94 cw(c3877.06,3807.94) v1@3862.88,3822.12 ; 3857,3578 v1(3857,3828)
  Bottom Layer w20: v1@3400,2585 v1(3400,2586) ; 3400,2628.26 3400,2680 ; pad.1@3470.73,3018.45 cw(c3452.1,3018.45) 3465.28,3005.28 cw(c3478.45,2992.1) pad.1@3478.45,3010.73 ; pad.1@3478.45,3018.45 3400,2940 3400,2680 ; pad.2@3544,3125 4108,3125 v1(5240,3125) 5240,3272 5394,3426 5574,3426 J1.4@5688,3540 5598,3630 v1(5222,3630) ; pad.2@3549.46,3119.54 cw(c3562.63,3106.37) 3562.63,3125 cw(c3562.63,3143.63) pad.2@3549.46,3130.46 ; U1.1@4916.58,2311.42 ccw(c4886.61,2341.39) 4929,2341.39 ccw(c4971.39,2341.39) U1.1@4941.42,2311.42 ; U1.1@4929,2299 4929,2372 4931,2374 ; J1.4@5688,3520.47 ccw(c5688,3473.33) 5654.66,3506.66 ccw(c5621.33,3540) 5668.47,3540 ccw(c5621.33,3540) 5654.66,3573.34 ccw(c5688,3606.67) J1.4@5688,3559.53 ; pad.3@6010.28,2338 ccw(c5991.65,2338) 6004.83,2351.17 ccw(c6018,2364.35) pad.3@6018,2345.72 ; pad.3@6018,2338 5982,2374 4931,2374 ; v1(3400,2586) 3400,2474 3500,2374 4931,2374 ; v1(3400,2586) 3400,2680
  other v1: 3764,3217 3804,3217 3764,3257 3804,3257 3764,3297 3804,3297 3764,3337 3804,3337 3764,3377 3804,3377 3764,3417 3804,3417 3764,3457 3804,3457 3764,3497 3804,3497
KEY-1: C1.2 J10.4 SW1.2 U3.12 | length 6478.3
  Top Layer w7: C1.2@3845,4474.69 3818,4447.69 3818,4140.4 4148,3810.4 v1(4148,3681) 4148,3575.8 4005,3432.8 4005,2864 v1(4025,2844) ; C1.2@3856.32,4476 SW1.2@3966,4476 ; SW1.2@3947.6,4457.6 ccw(c3903.16,4413.16) 3903.16,4476 ccw(c3903.16,4538.84) SW1.2@3947.6,4494.4 ; SW1.2@3952.55,4462.55 ccw(c3920.06,4430.06) 3920.06,4476 ccw(c3920.06,4521.94) SW1.2@3952.55,4489.45 ; v1@4016.69,2844 ccw(c3996.62,2844) 4010.81,2858.19 ccw(c4025,2872.38) v1@4025,2852.31 ; v1@4142.12,3675.12 cw(c4127.94,3660.94) 4148,3660.94 cw(c4168.06,3660.94) v1@4153.88,3675.12 ; v1@4142.12,3686.88 ccw(c4127.94,3701.06) 4148,3701.06 ccw(c4168.06,3701.06) v1@4153.88,3686.88 ; v1@4783.12,3710.12 cw(c4769.58,3696.58) 4788.73,3696.58 ; U3.12@4788.73,3389.45 4788.73,3715.73 v1(4789,3716) ; 4788.73,3695.29 cw(c4809.71,3695.29) v1@4794.88,3710.12 ; v1(6049,2054) 6170,2054 ; v1@6054.88,2048.12 cw(c6069.06,2033.94) 6069.06,2054 cw(c6069.06,2074.06) v1@6054.88,2059.88 ; J10.4@6183.98,2090.64 cw(c6136.07,2087.93) 6170,2054 ; J10.4@6190.97,2091.04 cw(c6157,2089.12) 6181.06,2065.06 cw(c6205.12,2041) J10.4@6207.04,2074.97 ; J10.4@6206.64,2067.98 ccw(c6203.93,2020.07) 6170,2054 ; J10.4@6208,2092 6170,2054
  Bottom Layer w7: v1@4019.12,2838.12 cw(c4004.94,2823.94) 4025,2823.94 cw(c4045.06,2823.94) v1@4030.88,2838.12 ; v1(4025,2844) 4025,2497 4096,2426 6004.8,2426 6081,2349.8 6081,2086 v1(6049,2054) ; v1(4148,3681) 4183,3716 v1(4789,3716) ; v1@4148,3689.31 ccw(c4148,3709.38) 4162.19,3695.19 ccw(c4176.38,3681) v1@4156.31,3681 ; v1@4783.12,3710.12 ccw(c4768.94,3695.94) 4768.94,3716 ccw(c4768.94,3736.06) v1@4783.12,3721.88 ; v1@6049,2062.31 ccw(c6049,2082.38) 6063.19,2068.19 ccw(c6077.38,2054) v1@6057.31,2054
KEY-2: C4.2 J10.5 SW2.2 U3.28 | length 6408.6
  Top Layer w7: v1@4183.12,3686.88 ccw(c4168.94,3701.06) 4189,3701.06 ccw(c4209.06,3701.06) v1@4194.88,3686.88 ; v1(4189,3681) 4189,3789.2 3832,4146.2 3832,4260 3866,4294 4342,4294 4393,4345 C4.2@4393,4474.69 4394.31,4476 SW2.2@4525,4476 ; v1(4433,2804) 4447,2790 4635,2790 4847.79,3002.79 U3.28@4847.79,3070.55 4847.79,3163.79 4894,3210 v1(4894,3257) ; SW2.2@4506.6,4457.6 ccw(c4462.16,4413.16) 4462.16,4476 ccw(c4462.16,4538.84) SW2.2@4506.6,4494.4 ; SW2.2@4511.55,4462.55 ccw(c4479.06,4430.06) 4479.06,4476 ccw(c4479.06,4521.94) SW2.2@4511.55,4489.45 ; v1@4888.12,3251.12 cw(c4873.94,3236.94) 4894,3236.94 cw(c4914.06,3236.94) v1@4899.88,3251.12
  Bottom Layer w7: v1@4189,3672.69 cw(c4189,3652.62) 4203.19,3666.81 cw(c4217.38,3681) v1@4197.31,3681 ; v1(4189,3681) 4217,3653 4747.6,3653 4894,3506.6 v1(4894,3257) ; v1@4427.12,2798.12 cw(c4412.93,2783.94) 4433,2783.94 cw(c4453.06,2783.94) v1@4438.88,2798.12 ; v1(4433,2804) 4433,2515.4 4466.4,2482 4882,2482 ; 4814,2482 4882,2482 ; v1@4888.12,3262.88 ccw(c4873.94,3277.06) 4894,3277.06 ccw(c4914.06,3277.06) v1@4899.88,3262.88 ; J10.5@6183.94,1992 ccw(c6125.86,1992) 6166.93,2033.07 ccw(c6208,2074.14) J10.5@6208,2016.06 ; J10.5@6190.94,1992 ccw(c6149.76,1992) 6178.88,2021.12 ccw(c6208,2050.24) J10.5@6208,2009.06 ; J10.5@6208,1992 6137,2063 6137,2373 6028,2482 4882,2482
KEY-3: C22.2 J10.6 SW4.2 U3.29 | length 7062
  Top Layer w7: v1@4224.12,3686.88 ccw(c4209.94,3701.06) 4230,3701.06 ccw(c4250.06,3701.06) v1@4235.88,3686.88 ; v1(4230,3681) 4230,3768 3846,4152 3846,4254.2 3871.8,4280 4875,4280 4952,4357 C22.2@4952,4474.69 4953.31,4476 SW4.2@5084,4476 ; v1@4392.12,2795.69 cw(c4392.12,2775.62) 4406.31,2789.81 cw(c4420.5,2804) v1@4400.44,2804 ; v1(4392.12,2804) 4420.12,2776 4504,2776 4640.8,2776 4867.47,3002.67 U3.29@4867.47,3070.55 4867.47,3163.67 4923,3219.2 4923,3283 v1(4922,3284) ; v1@4916.12,3278.12 cw(c4899.52,3261.52) 4923,3261.52 ; 4923,3266.35 cw(c4939.65,3266.35) v1@4927.88,3278.12 ; SW4.2@5065.6,4457.6 ccw(c5021.16,4413.16) 5021.16,4476 ccw(c5021.16,4538.84) SW4.2@5065.6,4494.4 ; SW4.2@5070.55,4462.55 ccw(c5038.06,4430.06) 5038.06,4476 ccw(c5038.06,4521.94) SW4.2@5070.55,4489.45
  Bottom Layer w7: v1(4230,3681) 4244,3667 4753.4,3667 4922,3498.4 v1(4922,3284) ; v1@4386.25,2798.12 cw(c4372.06,2783.94) 4392.12,2783.94 cw(c4412.19,2783.94) v1@4398,2798.12 ; v1(4392.12,2804) 4392.12,2536.47 4460.6,2468 6022.2,2468 6123,2367.2 6123,1977 J10.6@6208,1892 ; v1@4916.12,3289.88 ccw(c4901.94,3304.06) 4922,3304.06 ccw(c4942.06,3304.06) v1@4927.88,3289.88 ; J10.6@6183.94,1892 ccw(c6125.86,1892) 6166.93,1933.07 ccw(c6208,1974.14) J10.6@6208,1916.06 ; J10.6@6190.94,1892 ccw(c6149.76,1892) 6178.88,1921.12 ccw(c6208,1950.24) J10.6@6208,1909.06
LCD-CS1: J8.1 J11.15 LCD1.15 U3.19 | length 6509.8
  Top Layer w7: v1(3941,2521) 4084,2664 5458.41,2664 5523.41,2729 6020,2729 6063,2772 6063,3189 6117,3243 6259,3243 J8.1@6308,3292 ; v1@3941,2529.31 ccw(c3941,2549.38) 3955.19,2535.19 ccw(c3969.38,2521) v1@3949.31,2521 ; v1@4062,2937.31 ccw(c4062,2957.38) 4076.19,2943.19 ccw(c4090.38,2929) v1@4070.31,2929 ; v1@4064.3,2926.7 v1(4062,2929) ; J11.15@4410,4162.91 cw(c4410,4109.58) 4447.71,4147.29 cw(c4485.42,4185) J11.15@4432.09,4185 ; J11.15@4410,4169.91 cw(c4410,4133.48) 4435.76,4159.24 cw(c4461.52,4185) J11.15@4425.09,4185 ; J11.15@4410,4185 4564.69,4030.31 ; LCD1.15@4549.08,3992.63 ccw(c4511.43,4030.3) 4564.69,4030.3 ; LCD1.15@4551.53,3959.26 cw(c4532.11,3933.1) 4564.69,3933.1 ; LCD1.15@4554.03,3987.67 ccw(c4528.31,4013.41) 4564.69,4013.41 ccw(c4601.08,4013.41) LCD1.15@4575.36,3987.67 ; LCD1.15@4555.7,3964.88 cw(c4542.44,3947.01) 4564.69,3947.01 cw(c4586.95,3947.01) LCD1.15@4573.69,3964.88 ; LCD1.15@4577.86,3959.26 ccw(c4597.27,3933.1) 4564.69,3933.1 ; LCD1.15@4580.31,3992.63 cw(c4617.96,4030.3) 4564.69,4030.3 ; U3.19@4737.55,3220.16 4690.16,3220.16 4610,3140 4610,3001 4565,2956 4089,2956 v1(4062,2929) ; J8.1@6283.94,3292 cw(c6225.86,3292) 6266.93,3250.93 cw(c6308,3209.86) J8.1@6308,3267.94 ; J8.1@6290.94,3292 cw(c6249.76,3292) 6278.88,3262.88 cw(c6308,3233.76) J8.1@6308,3274.94 ; v1(4062,2929) 4047,2944 4047,3415.4 4564.69,3933.1 ; 4564.69,3933.1 LCD1.15@4564.69,3977 4564.69,4030.31
  Bottom Layer w7: v1@3935.12,2526.88 ccw(c3920.94,2541.06) 3941,2541.06 ccw(c3961.06,2541.06) v1@3946.88,2526.88 ; v1(3941,2521) 3941,2865 4005,2929 v1(4062,2929) ; v1@4056.12,2923.12 ccw(c4041.94,2908.94) 4041.94,2929 ccw(c4041.94,2949.06) v1@4056.12,2934.88
LCD-CS2: J8.2 J11.16 LCD1.16 U3.20 | length 6292.9
  Top Layer w7: v1(3988,2521) 4117,2650 5464.21,2650 5529.21,2715 6025.8,2715 6077,2766.2 6077,3086.94 6131.06,3141 6257,3141 J8.2@6308,3192 ; v1@3988,2529.31 ccw(c3988,2549.38) 4002.19,2535.19 ccw(c4016.38,2521) v1@3996.31,2521 ; v1@4053.69,2888 ccw(c4033.62,2888) 4047.81,2902.19 ccw(c4062,2916.38) 4062,2896.31 ccw(c4062,2916.38) 4076.19,2902.19 ccw(c4090.38,2888) v1@4070.31,2888 ; J11.16@4310,4162.91 cw(c4310,4109.58) 4347.71,4147.29 cw(c4385.42,4185) J11.16@4332.09,4185 ; J11.16@4310,4169.91 cw(c4310,4133.48) 4335.76,4159.24 cw(c4361.52,4185) J11.16@4325.09,4185 ; J11.16@4310,4185 4485.96,4009.04 ; LCD1.16@4470.34,3961.38 cw(c4432.63,3923.67) 4485.96,3923.67 cw(c4539.29,3923.67) LCD1.16@4501.58,3961.38 ; LCD1.16@4475.29,3966.33 cw(c4449.53,3940.57) 4485.96,3940.57 cw(c4522.39,3940.57) LCD1.16@4496.63,3966.33 ; LCD1.16@4478.1,3997.65 ccw(c4473.76,4009.04) 4485.96,4009.04 ; LCD1.16@4493.81,3997.65 cw(c4498.15,4009.04) 4485.96,4009.04 ; U3.20@4737.55,3200.47 4690.47,3200.47 4624,3134 4624,2995.2 4570.8,2942 4116,2942 v1(4062,2888) 4033,2917 4033,3421.2 4485.96,3874.16 LCD1.16@4485.96,3977 4485.96,4009.04 ; J8.2@6283.94,3192 cw(c6225.86,3192) 6266.93,3150.93 cw(c6308,3109.86) J8.2@6308,3167.94 ; J8.2@6290.94,3192 cw(c6249.76,3192) 6278.88,3162.88 cw(c6308,3133.76) J8.2@6308,3174.94
  Bottom Layer w7: v1@3982.12,2526.88 ccw(c3967.94,2541.06) 3988,2541.06 ccw(c4008.06,2541.06) v1@3993.88,2526.88 ; v1(3988,2521) 3988,2863 4013,2888 v1(4062,2888) ; v1@4056.12,2882.12 ccw(c4041.94,2867.94) 4041.94,2888 ccw(c4041.94,2908.06) v1@4056.12,2893.88
LCD-DB0: J9.1 J11.7 LCD1.7 U3.5 | length 3104.8
  Top Layer w7: U3.5@4926.53,3389.45 4926.53,3858.93 4957.6,3890 5107.58,3890 LCD1.7@5194.58,3977 ; 5156.29,3938.71 LCD1.7@5194.58,3977 ; LCD1.7@5178.96,3992.62 ccw(c5141.25,4030.33) 5194.58,4030.33 ccw(c5247.91,4030.33) LCD1.7@5210.2,3992.62 ; LCD1.7@5183.91,3987.67 ccw(c5158.15,4013.43) 5194.58,4013.43 ccw(c5231.01,4013.43) LCD1.7@5205.25,3987.67 ; 5194.58,4094.45 cw(c5300.55,4094.45) J11.7@5225.62,4169.38 ; 5194.58,4111.35 cw(c5283.65,4111.35) J11.7@5220.67,4174.33 ; 5194.58,4128.25 cw(c5266.75,4128.25) J11.7@5215.72,4179.28 ; 5194.58,4145.15 cw(c5249.85,4145.15) J11.7@5210.77,4184.23 ; 5194.58,4162.05 cw(c5232.95,4162.05) J11.7@5205.82,4189.18 ; J11.7@5210,4185 5194.58,4169.58 LCD1.7@5194.58,3977 ; 5156.87,3939.29 cw(c5194.58,3901.58) 5194.58,3954.91 ccw(c5194.58,3901.58) 5156.87,3939.29 ; 5156.87,3939.29 ccw(c5119.16,3977) 5172.49,3977 cw(c5119.16,3977) 5156.87,3939.29 ; 5168.82,3951.24 cw(c5194.58,3925.48) 5194.58,3961.91 ccw(c5194.58,3925.48) 5168.82,3951.24 ; 5168.82,3951.24 ccw(c5143.06,3977) 5179.49,3977 cw(c5143.06,3977) 5168.82,3951.24
  Bottom Layer w7: J11.7@5210,4162.91 cw(c5210,4109.58) 5247.71,4147.29 cw(c5285.42,4185) J11.7@5232.09,4185 ; J11.7@5210,4169.91 cw(c5210,4133.48) 5235.76,4159.24 cw(c5261.52,4185) J11.7@5225.09,4185 ; J11.7@5210,4185 5265,4130 6146,4130 J9.1@6208,4192 ; J9.1@6183.94,4192 cw(c6125.86,4192) 6166.93,4150.93 cw(c6208,4109.86) J9.1@6208,4167.94 ; J9.1@6190.94,4192 cw(c6149.76,4192) 6178.88,4162.88 cw(c6208,4133.76) J9.1@6208,4174.94
LCD-DB1: J9.2 J11.8 LCD1.8 U3.7 | length 2824.7
  Top Layer w7: U3.7@4887.16,3389.45 4887.16,3458.16 4912.53,3483.53 4912.53,3864.73 4951.8,3904 5042.85,3904 LCD1.8@5115.85,3977 ; LCD1.8@5093.76,3977 cw(c5040.42,3977) 5078.14,3939.29 cw(c5115.85,3901.58) LCD1.8@5115.85,3954.91 ; J11.8@5094.38,4169.38 cw(c5042.55,4117.55) 5115.85,4117.55 ; J11.8@5099.33,4174.33 cw(c5059.45,4134.45) 5115.85,4134.45 ; LCD1.8@5100.23,3992.62 ccw(c5062.52,4030.33) 5115.85,4030.33 ccw(c5169.18,4030.33) LCD1.8@5131.47,3992.62 ; LCD1.8@5100.76,3977 cw(c5064.32,3977) 5090.09,3951.24 cw(c5115.85,3925.48) LCD1.8@5115.85,3961.91 ; J11.8@5104.28,4179.28 cw(c5076.35,4151.35) 5115.85,4151.35 ; LCD1.8@5105.18,3987.67 ccw(c5079.41,4013.43) 5115.85,4013.43 ccw(c5152.28,4013.43) LCD1.8@5126.52,3987.67 ; J11.8@5110,4185 5115.85,4179.15 LCD1.8@5115.85,3977 ; LCD1.8@5115.85,3972.85 LCD1.8@5115.85,3977 ; 5115.85,4145.78 cw(c5149.22,4145.78) J11.8@5125.62,4169.38
  Bottom Layer w7: J11.8@5110,4162.91 cw(c5110,4109.58) 5147.71,4147.29 cw(c5185.42,4185) J11.8@5132.09,4185 ; J11.8@5110,4169.91 cw(c5110,4133.48) 5135.76,4159.24 cw(c5161.52,4185) J11.8@5125.09,4185 ; J11.8@5110,4185 5179,4116 6103.8,4116 6127.8,4092 J9.2@6208,4092 ; J9.2@6190.99,4074.99 ccw(c6149.92,4033.92) 6149.92,4092 ccw(c6149.92,4150.08) J9.2@6190.99,4109.01 ; J9.2@6195.94,4079.94 ccw(c6166.82,4050.82) 6166.82,4092 ccw(c6166.82,4133.18) J9.2@6195.94,4104.06
LCD-DB2: J9.3 J11.9 LCD1.9 U3.8 | length 2752.7
  Top Layer w7: U3.8@4867.47,3389.45 4867.47,3458.74 4898.53,3489.8 4898.53,3870.53 4946,3918 4978.11,3918 LCD1.9@5037.11,3977 5037.11,4157.89 J11.9@5010,4185 ; LCD1.9@5015.02,3977 cw(c4961.69,3977) 4999.4,3939.29 cw(c5037.11,3901.58) LCD1.9@5037.11,3954.91 ; LCD1.9@5021.49,3992.62 ccw(c4983.78,4030.33) 5037.11,4030.33 ccw(c5090.44,4030.33) LCD1.9@5052.73,3992.62 ; LCD1.9@5022.02,3977 cw(c4985.59,3977) 5011.35,3951.24 cw(c5037.11,3925.48) LCD1.9@5037.11,3961.91 ; LCD1.9@5026.44,3987.67 ccw(c5000.68,4013.43) 5037.11,4013.43 ccw(c5073.54,4013.43) LCD1.9@5047.78,3987.67
  Bottom Layer w7: J11.9@5010,4162.91 cw(c5010,4109.58) 5047.71,4147.29 cw(c5085.42,4185) J11.9@5032.09,4185 ; J11.9@5010,4169.91 cw(c5010,4133.48) 5035.76,4159.24 cw(c5061.52,4185) J11.9@5025.09,4185 ; J11.9@5010,4185 5093,4102 6098,4102 J9.3@6208,3992 ; J9.3@6183.94,3992 ccw(c6125.86,3992) 6166.93,4033.07 ccw(c6208,4074.14) J9.3@6208,4016.06 ; J9.3@6190.94,3992 ccw(c6149.76,3992) 6178.88,4021.12 ccw(c6208,4050.24) J9.3@6208,4009.06
LCD-DB3: J9.4 J11.10 LCD1.10 U3.9 | length 3047.7
  Top Layer w7: U3.9@4847.79,3389.45 4847.79,3458.86 4884.53,3495.6 4884.53,3903.15 LCD1.10@4958.37,3977 4958.37,4136.63 J11.10@4910,4185 ; J11.10@4910,4162.91 cw(c4910,4109.58) 4947.71,4147.29 cw(c4985.42,4185) J11.10@4932.09,4185 ; J11.10@4910,4169.91 cw(c4910,4133.48) 4935.76,4159.24 cw(c4961.52,4185) J11.10@4925.09,4185 ; LCD1.10@4936.28,3977 cw(c4882.95,3977) 4920.66,3939.29 cw(c4958.37,3901.58) LCD1.10@4958.37,3954.91 ; LCD1.10@4942.75,3992.62 ccw(c4905.04,4030.33) 4958.37,4030.33 ccw(c5011.71,4030.33) LCD1.10@4973.99,3992.62 ; LCD1.10@4943.28,3977 cw(c4906.85,3977) 4932.61,3951.24 cw(c4958.37,3925.48) LCD1.10@4958.37,3961.91 ; LCD1.10@4947.7,3987.67 ccw(c4921.94,4013.43) 4958.37,4013.43 ccw(c4994.81,4013.43) LCD1.10@4969.04,3987.67
  Bottom Layer w7: J11.10@4910,4162.91 cw(c4910,4109.58) 4947.71,4147.29 cw(c4985.42,4185) J11.10@4932.09,4185 ; J11.10@4910,4169.91 cw(c4910,4133.48) 4935.76,4159.24 cw(c4961.52,4185) J11.10@4925.09,4185 ; J11.10@4910,4185 5007,4088 6092.2,4088 6148.92,4031.28 6148.92,3951.08 J9.4@6208,3892 ; J9.4@6183.94,3892 ccw(c6125.86,3892) 6166.93,3933.07 ccw(c6208,3974.14) J9.4@6208,3916.06 ; J9.4@6190.94,3892 ccw(c6149.76,3892) 6178.88,3921.12 ccw(c6208,3950.24) J9.4@6208,3909.06